# Altium PCB STM32.PcbDoc
Units mm, origin at the board's own origin, x right, y up, seen from the top; angles counter-clockwise.
Board outline 69.98 x 44.55 mm, 2 copper layers (Top Layer, Bottom Layer); 48 components, 65 nets, 240 pads, 53 vias.
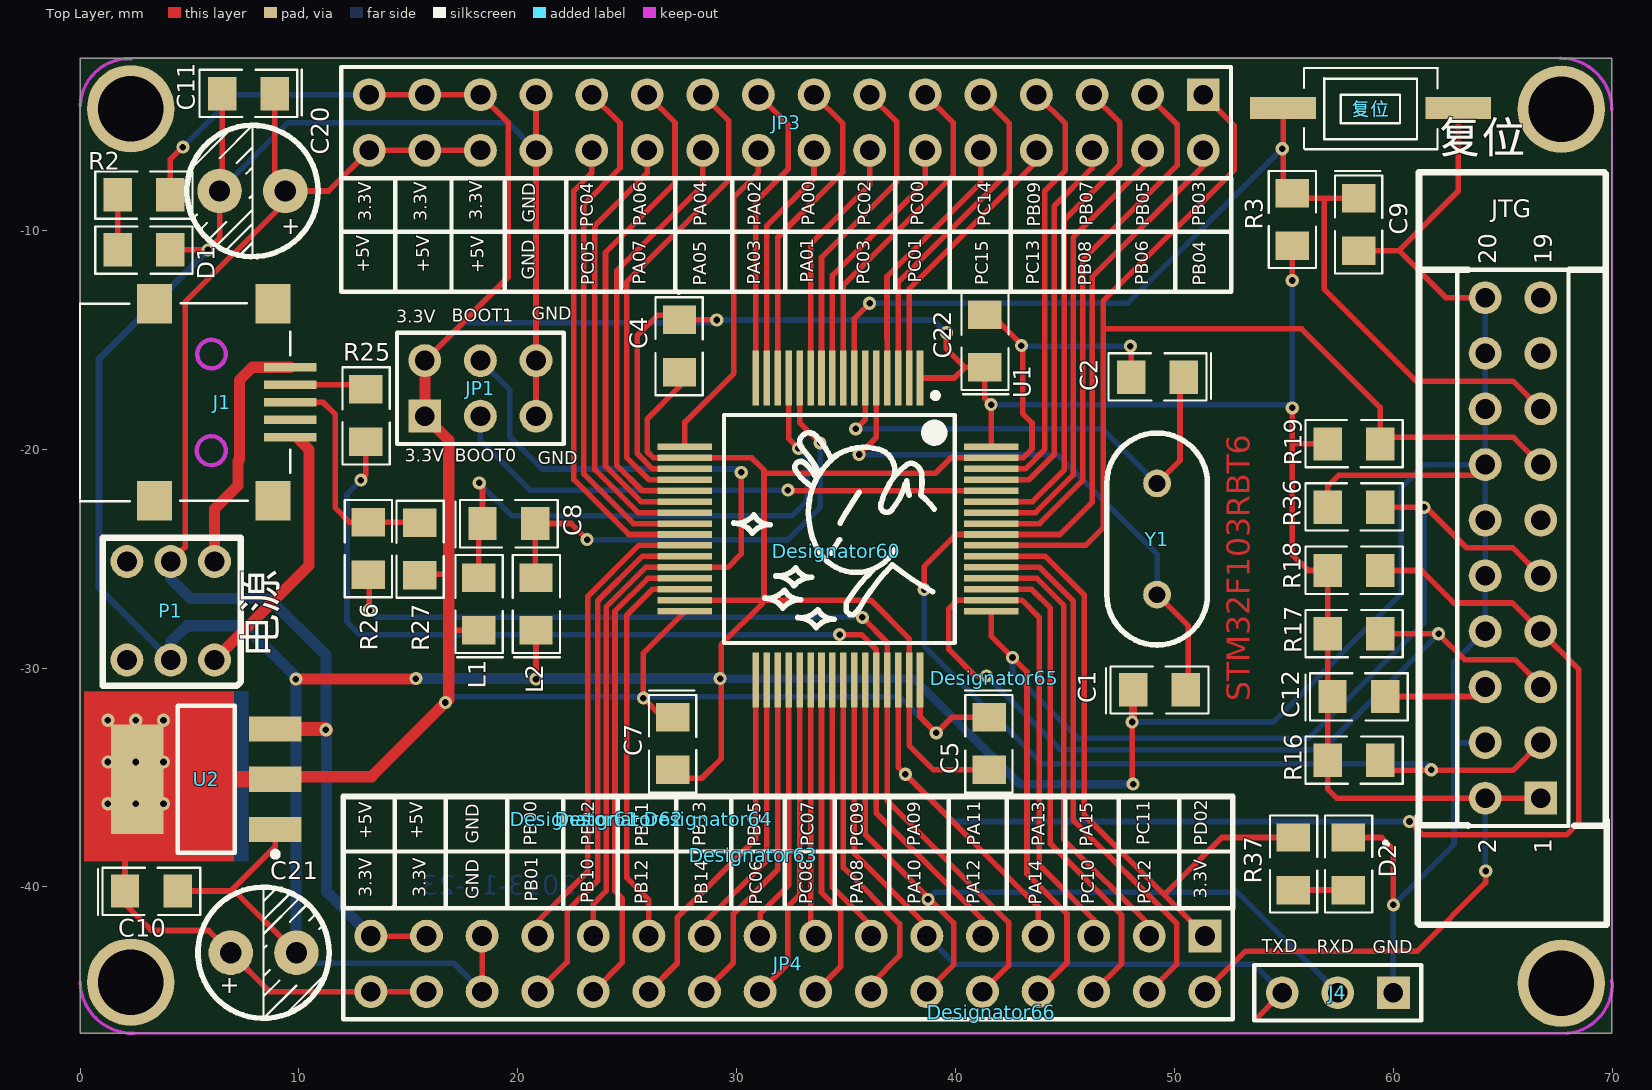
[diagram p0: Top Layer view]
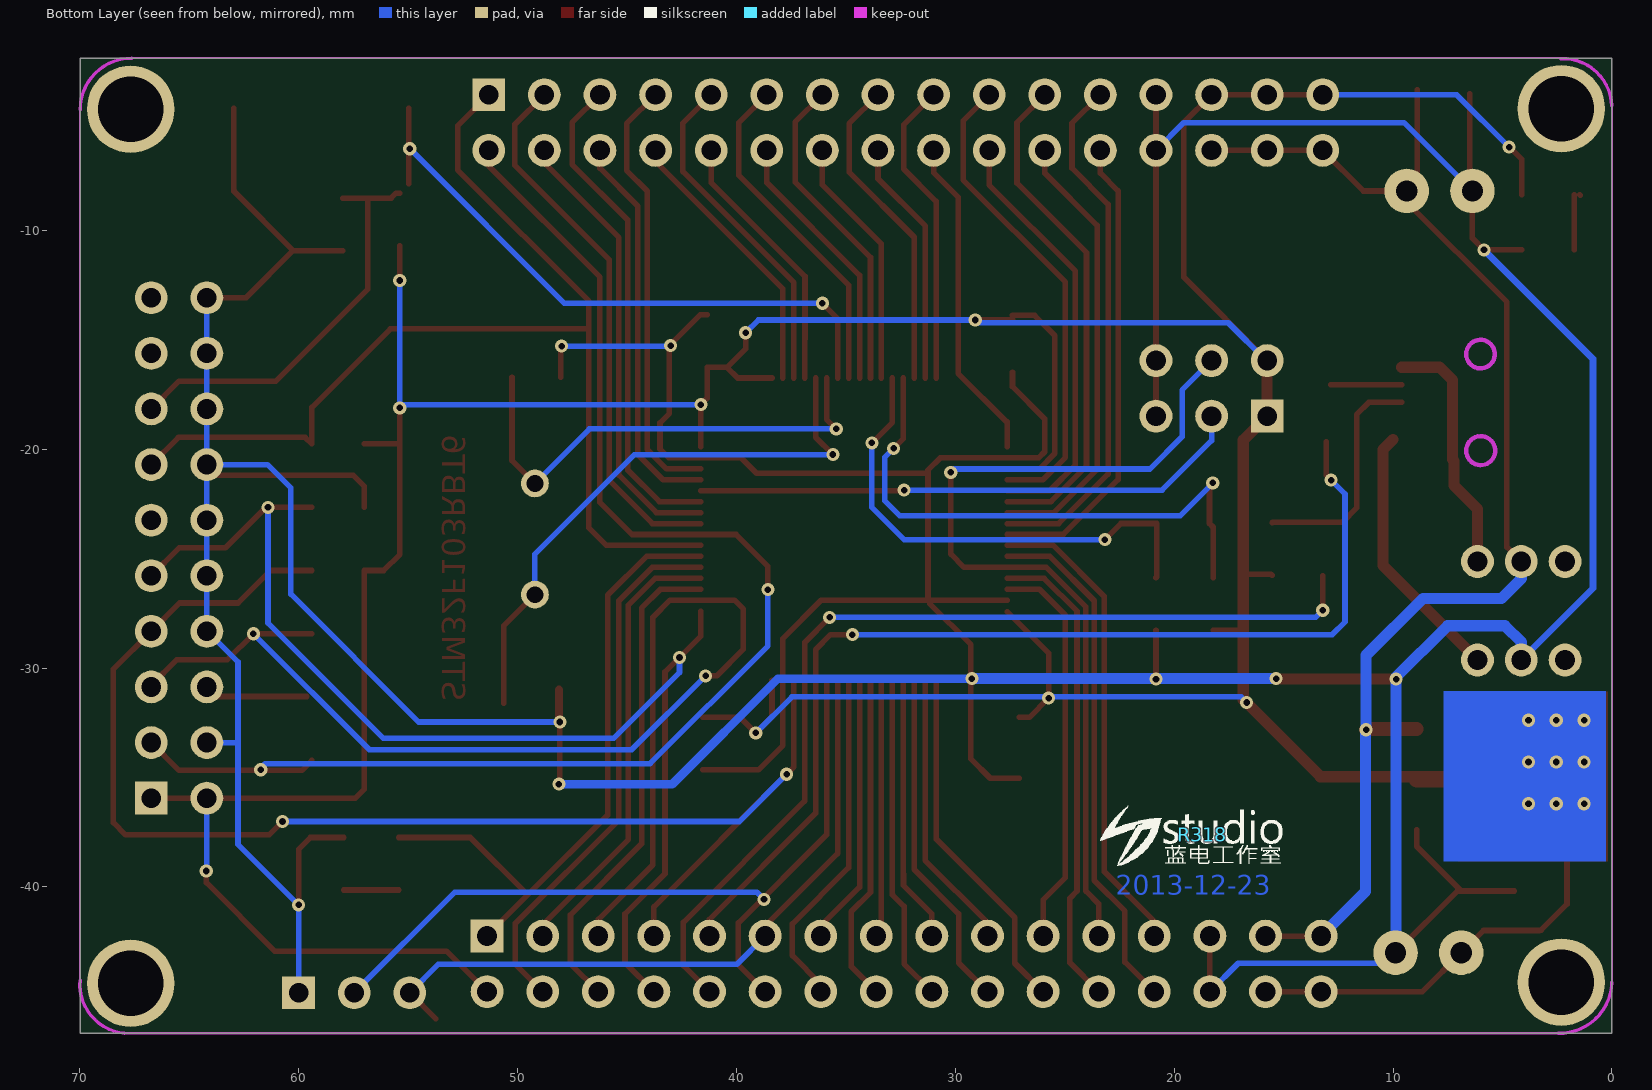
[diagram p1: Bottom Layer view, seen from below]

## Layer stack, top to bottom
Top Layer: signal copper 0.0356
Dielectric: dielectric 0.32, FR-4, Dk 4.8
Bottom Layer: signal copper 0.0356

## Board outline
0,-2.134 0,-46.685 69.977,-46.685 69.977,-2.134 0,-2.134

## Design rules (kind name [scope] priority, off if disabled: settings)
Clearance [All] p1: gap=0.254
FabricationTestpoint [(IsPad And (OnTopLayer Or OnBottomLayer))] p1: side=3 testpointundercomponent=TRUE minsize=1.016 maxsize=2.54 preferedsize=1.524 minholesize=0 maxholesize=1.016 preferedholesize=0.813 testpointgrid=0.025 allowsidetop=TRUE allowsidebottom=TRUE usegrid=TRUE gridtolerance=0
PolygonConnect [All] p1: connectstyle=Relief reliefconductorwidth=0.254 reliefentries=4 polygonreliefangle="90 Angle" airgapwidth=0.254
RoutingVias [All] p1: holewidth=0.3 width=0.6 viastyle="Through Hole" minholewidth=0.3 minwidth=0.6 maxholewidth=0.3 maxwidth=0.6
SilkToSolderMaskClearance SilkscreenOverComponentPads [IsPad] p1: minsilkscreentomaskgap=0.254 clearancetoexposedcopper=TRUE
SolderMaskExpansion [All] p1: expansion=0.102
Width [All] p1: maxlimit=0.762 minlimit=0.254 preferedwidth=0.254
26 further rules are at their usual default settings.

## Classes and differential pairs
component class STM32最小系统: C1 C2 C4 C5 C7 C8 C9 C10 C11 C12 C20 C21 C22 D1 D2 J1 J4 JP1 JP3 JP4 JTG L1 L2 P1 R2 R3 R16 R17 R18 R19 R25 R26 R27 R36 R37 U1 U2 Y1 Y2 复位

## Components (designator, comment, footprint, x,y, rotation, side; value= is the part's Value field where it differs from the comment)
C1 "Cap" C0805 49.301,-30.988 r0 top
C2 "Cap" C0805 49.225,-16.713 r180 top
C4 "Cap" C0805 27.381,-15.291 r270 top
C5 "Cap" C0805 41.529,-33.452 r270 top
C7 "Cap" C0805 27.076,-33.452 r270 top
C8 "Cap" C0805 19.583,-23.393 r0 top
C9 "Cap" C0805 58.42,-9.728 r270 top
C10 "Cap" C0805 3.251,-40.183 r0 top
C11 "Capacitor" C0805 7.696,-3.759 r180 top
C12 "Cap" C0805 58.413,-31.298 r0 top
C20 "Capacitor" 47uF_25V 7.874,-8.204 r180 top
C21 "Capacitor" 47uF_25V 8.382,-43.002 r0 top
C22 "Cap" C0805 41.326,-15.062 r90 top
D1 "LED" 0805D 2.921,-10.897 r0 top
D2 "LED" 0805D 57.937,-38.938 r90 top
Designator60 "Comment" 兔斯基-1 34.544,-24.663 r90 top
Designator61 "Comment" 蓝电studio 22.581,-36.906 r0 top
Designator62 "Comment" 蓝电studio 24.638,-36.906 r0 top
Designator63 "Comment" 蓝电studio 30.759,-38.557 r0 top
Designator64 "Comment" 蓝电studio 28.702,-36.906 r0 top
Designator65 "Comment" 蓝电studio 41.758,-30.455 r0 top
Designator66 "Comment" 蓝电studio 41.631,-45.72 r0 top
Designator67 "Comment" 蓝电studio 33.198,-51.232 r0 top
J1 "Mini_USB" Mini_USB 6.502,-17.856 r0 top
J4 "Header 3" HDR1X3 57.455,-44.831 r180 top
JP1 "Header 3X2" HDR2X3 18.288,-17.221 r0 top
JP3 "Header 16X2" HDR2X16 32.258,-5.08 r180 top locked
JP4 "TFT" HDR2X16 32.334,-43.51 r180 top
JTG "Header 10X2" HDR2X10 65.456,-24.511 r90 top
L1 "Inductor" C0805 18.212,-27.076 r90 top
L2 "Inductor" C0805 20.828,-27.076 r90 top
P1 "5.8*5.8MM 自锁开关 六脚" "5.8*5.8MM 自锁开关 六脚" 4.14,-27.381 r270 top
R2 "Resistor" R0805 2.921,-8.382 r0 top
R3 "Resistor" R0805 55.372,-9.5 r90 top
R16 "Resistor" R0805 58.191,-34.214 r180 top
R17 "Resistor" R0805 58.191,-28.433 r180 top
R18 "Resistor" R0805 58.191,-25.542 r180 top
R19 "Resistor" R0805 58.191,-19.761 r180 top
R25 "Resistor" R0805 13.056,-18.466 r90 top
R26 "Resistor" R0805 13.157,-24.536 r90 top
R27 "Resistor" R0805 15.519,-24.562 r90 top
R36 "Resistor" R0805 58.191,-22.652 r180 top
R37 "Resistor" R0805 55.423,-38.938 r90 top
R318 "Comment" LDLOGO 18.72,-37.617 r180 bottom
U1 "STM32F103RBT6" LQFP-64N 34.62,-23.647 r270 top locked
U2 "ASM1117" SOT-223 5.766,-35.077 r90 top
Y1 "Xtal" CRYSTAL 49.2,-24.105 r270 top
复位 "SW-PB" TD-19XA 58.953,-4.42 r180 top (schematic designator RST1)

## Footprints (in the part's own frame and the unit in brackets; to place one, negate y for a bottom-side part, rotate by r counter-clockwise, add the part's x,y. Pads: shape width x height; smd on the part's side, far side on the other; paste and mask are expansions set on the pad)
"5.8*5.8MM 自锁开关 六脚" [mm]
  round 1.5 hole 0.9: 1(-2.25,2) 2(2.25,2) 3(-2.25,0) 4(2.25,0) 5(-2.25,-2) 6(2.25,-2)
  silkscreen extent -3.33,-3.11 3.43,3.2
47uF_25V [mil]
  round 80 hole 38: 1(-59.06,0) 2(59.06,0)
  silkscreen extent -118,-118 118,118, body extent -118,-119 120,119, height 433
0805D [mm]
  rect 1.3x1.524 smd: 1(-1.2,0) 2(1.2,0)
  silkscreen extent -2.23,-1.09 2.21,1.07, body extent -1.6,-0.8 1.6,0.8, height 1.07
C0805 [mm]
  rect 1.3x1.524 smd: 1(-1.2,0) 2(1.2,0)
  silkscreen extent -2.43,-1.09 2.24,1.07, body extent -0.87,-0.64 1.13,0.62, height 0.77
CRYSTAL [mil]
  round 50 hole 30: 1(-100,0) 2(100,0)
  silkscreen extent -191,-91 191,91, body extent -224,-90 222,93, height 138
HDR1X3 [mm] "Connector; Header; 3 Position"
  rect 1.5x1.5 hole 0.9: 1(-2.54,0)
  round 1.5 hole 0.9: 2(0,0) 3(2.54,0)
  silkscreen extent -3.81,-1.27 3.81,1.27, body extent -3.81,-1.27 3.81,1.27, height 7.58
HDR2X3 [mm] "Connector; Header; 3x2 Position"
  rect 1.5x1.5 hole 0.9: 1(-2.54,-1.27)
  round 1.5 hole 0.9: 2(-2.54,1.27) 3(0,-1.27) 4(0,1.27) 5(2.54,-1.27) 6(2.54,1.27)
  silkscreen extent -3.81,-2.54 3.81,2.54, body extent -3.81,-2.54 3.81,2.54, height 7.58
HDR2X10 [mm] "Connector; Header; 10x2 Position"
  rect 1.5x1.5 hole 0.9: 1(-11.43,-1.27)
  round 1.5 hole 0.9: 2(-11.43,1.27) 3(-8.89,-1.27) 4(-8.89,1.27) 5(-6.35,-1.27) 6(-6.35,1.27) 7(-3.81,-1.27) 8(-3.81,1.27) 9(-1.27,-1.27) 10(-1.27,1.27) 11(1.27,-1.27) 12(1.27,1.27) 13(3.81,-1.27) 14(3.81,1.27) 15(6.35,-1.27) 16(6.35,1.27) 17(8.89,-1.27) 18(8.89,1.27) 19(11.43,-1.27) 20(11.43,1.27)
  silkscreen extent -12.7,-2.54 12.7,2.54, body extent -12.7,-2.54 12.7,2.54, height 7.58
HDR2X16 [mm] "Connector; Header; 16x2 Position"
  rect 1.5x1.5 hole 0.9: 1(-19.05,-1.27)
  round 1.5 hole 0.9: 2(-19.05,1.27) 3(-16.51,-1.27) 4(-16.51,1.27) 5(-13.97,-1.27) 6(-13.97,1.27) 7(-11.43,-1.27) 8(-11.43,1.27) 9(-8.89,-1.27) 10(-8.89,1.27) 11(-6.35,-1.27) 12(-6.35,1.27) 13(-3.81,-1.27) 14(-3.81,1.27) 15(-1.27,-1.27) 16(-1.27,1.27) 17(1.27,-1.27) 18(1.27,1.27) 19(3.81,-1.27) 20(3.81,1.27) 21(6.35,-1.27) 22(6.35,1.27) 23(8.89,-1.27) 24(8.89,1.27) 25(11.43,-1.27) 26(11.43,1.27) 27(13.97,-1.27) 28(13.97,1.27) 29(16.51,-1.27) 30(16.51,1.27) 31(19.05,-1.27) 32(19.05,1.27)
  silkscreen extent -20.32,-2.54 20.32,2.54, body extent -20.32,-2.54 20.32,2.54, height 7.58
LDLOGO [mm]
  silkscreen extent -4.65,-1.42 3.66,1.3
LQFP-64N [mm] "TSQFP, 64-Leads, Body 12.0x12.0mm (max), Pitch 0.50mm, IPC Medium Density"
  rect 2.5x0.3 smd: 1(-6.9,3.75) 2(-6.9,3.25) 3(-6.9,2.75) 4(-6.9,2.25) 5(-6.9,1.75) 6(-6.9,1.25) 7(-6.9,0.75) 8(-6.9,0.25) 9(-6.9,-0.25) 10(-6.9,-0.75) 11(-6.9,-1.25) 12(-6.9,-1.75) 13(-6.9,-2.25) 14(-6.9,-2.75) 15(-6.9,-3.25) 16(-6.9,-3.75) 33(6.9,-3.75) 34(6.9,-3.25) 35(6.9,-2.75) 36(6.9,-2.25) 37(6.9,-1.75) 38(6.9,-1.25) 39(6.9,-0.75) 40(6.9,-0.25) 41(6.9,0.25) 42(6.9,0.75) 43(6.9,1.25) 44(6.9,1.75) 45(6.9,2.25) 46(6.9,2.75) 47(6.9,3.25) 48(6.9,3.75)
  rect 0.3x2.5 smd: 17(-3.75,-7) 18(-3.25,-7) 19(-2.75,-7) 20(-2.25,-7) 21(-1.75,-7) 22(-1.25,-7) 23(-0.75,-7) 24(-0.25,-7) 25(0.25,-7) 26(0.75,-7) 27(1.25,-7) 28(1.75,-7) 29(2.25,-7) 30(2.75,-7) 31(3.25,-7) 32(3.75,-7) 49(3.75,7) 50(3.25,7) 51(2.75,7) 52(2.25,7) 53(1.75,7) 54(1.25,7) 55(0.75,7) 56(0.25,7) 57(-0.25,7) 58(-0.75,7) 59(-1.25,7) 60(-1.75,7) 61(-2.25,7) 62(-2.75,7) 63(-3.25,7) 64(-3.75,7)
  silkscreen extent -6.22,-5.21 5.21,5.33, body extent -6.1,-6.1 6.1,6.1, height 1.6
Mini_USB [mm]
  rect 2.4x0.4 smd: 1(3.1,1.6) 2(3.1,0.8) 3(3.1,0) 4(3.1,-0.8) 5(3.1,-1.6)
  rect 1.6x1.8 smd: 6(2.3,-4.5) 7(2.3,4.5) 8(-3.1,4.5) 9(-3.1,-4.5)
  silkscreen extent -6.51,-4.52 3.1,4.52, body extent -5.92,-5.32 3.28,5.38, height 3.95
R0805 [mm]
  rect 1.3x1.524 smd: 1(-1.2,0) 2(1.2,0)
  silkscreen extent -2.23,-1.09 2.21,1.07, body extent -0.93,-0.63 1.07,0.63, height 0.77
SOT-223 [mm]
  rect 1.15x2.4 smd: 1(-2.3,-3.15) 2(0,-3.15) 3(2.3,-3.15)
  rect 5x2.4 smd: 2(0,3.15)
  silkscreen extent -3.55,-3.27 3.35,1.3, body extent -3.25,-3.45 3.25,3.51, height 1.65
TD-19XA [mm]
  rect 3x1 smd: 1(-4,0) 2(4,0)
  silkscreen extent -3.06,-1.83 3.04,1.88, body extent -3.92,-1.85 3.97,2, height 2.5
兔斯基-1 [mm]
  silkscreen extent -3.48,-4.47 5.41,4.67
蓝电studio [mm]

## Part data
C1 C2 C4 C5 C7 C8 C9 C10 C12 C22: "Capacitor"
J4: "Header, 3-Pin"
JP1: "Header, 3-Pin, Dual row"
JP3: "Header, 16-Pin, Dual row"
JP4: library part "Header 16X2", "Header, 16-Pin, Dual row"
JTG: "Header, 10-Pin, Dual row"
复位: library part Switch

## Free pads (board coordinates)
  round 4 hole 3: 0(67.666,-4.47) 1(67.666,-44.399) 2(2.311,-44.348) 3(2.311,-4.445)

## Via types
v1: diameter 0.6, hole 0.3, Top Layer to Bottom Layer, 53 vias

## Nets (pads, with @x,y where several pads share a name; then routed paths per layer and width w, separated by ;. In a path a pad name is that pad's centre, name@x,y a point inside that pad or via, vN(x,y) a via of type N, cw(c..) or ccw(c..) an arc to the next point about the centre after c; other vN are vias at no path point)
3.3V: C4.1 C5.1 C7.1 C10.1 C12.1 C21.1 C22.1 JP1.1 JP1.2 JP3.27 JP3.29 JP3.31 JP4.2 JP4.30 JP4.32 JTG.1 JTG.2 L1.1 R2.2 R3.1 R16.2 R17.2 R18.2 R19.2 R27.1 U1.1 U1.19 U1.32 U1.48 U1.64 U2.2 | length 237.7
  Top Layer w0.254: U2.2@2.616,-35.077 2.051,-35.642 C10.1 2.051,-40.786 3.232,-41.967 3.298,-41.967 3.316,-41.986 5.866,-41.986 C21.1 8.66,-44.78 JP4.32 JP4.30 ; R2.2 4.121,-6.75 v1@4.674,-6.198 ; JP3.31 JP3.29 JP3.27 19.558,-5.08 19.558,-12.141 JP1.2 ; R27.1 15.576,-25.705 16.84,-25.705 ; 16.84,-28.276 L1.1 ; C7.1 26.613,-32.252 v1(25.73,-31.369) 25.73,-29.318 U1.32@27.62,-27.428 ; C4.1 v1@29.077,-14.091 ; C4.1@27.381,-13.888 26.371,-13.888 25.451,-14.808 25.451,-20.193 26.155,-20.897 U1.19 ; U1.48 38.37,-32.223 v1(39.11,-32.963) 39.821,-32.252 C5.1 ; U1.1 39.932,-16.747 40.418,-16.262 ; v1(39.573,-14.681) 39.573,-15.418 40.418,-16.262 ; U1.64 v1(41.62,-17.965) 41.326,-17.671 C22.1 40.418,-16.262 ; JP4.2 53.238,-42.926 61.087,-42.926 64.211,-39.802 v1(64.211,-39.268) ; v1(55.372,-18.11) 55.372,-24.806 56.109,-25.542 R18.2 R17.2 R16.2 56.991,-35.528 57.404,-35.941 JTG.2 JTG.1 ; v1(55.372,-12.294) R3.1 ; 55.397,-19.761 R19.2
  Top Layer w0.508: U2.2@8.916,-35.077 9.03,-34.963 13.322,-34.963 16.84,-31.445 16.84,-28.276 16.84,-25.705 16.84,-19.583 JP1.1 JP1.2
  Top Layer w0.762: U2.2@2.616,-35.077 U2.2@8.916,-35.077
  Bottom Layer w0.254: v1(4.699,-6.198) 7.087,-3.81 JP3.31 ; JP1.2 15.799,-15.951 17.526,-14.224 28.956,-14.224 v1(29.083,-14.097) 38.989,-14.097 v1(39.573,-14.681) ; v1(16.688,-31.572) 16.942,-31.318 37.465,-31.318 v1(39.11,-32.963) ; v1(41.62,-17.965) 55.227,-17.965 v1(55.372,-18.11) v1(55.372,-12.294) ; JTG.2 64.186,-39.243 v1(64.211,-39.268)
  other v1: 1.27,-36.195 2.54,-36.195 3.81,-36.195 1.27,-34.29 2.54,-34.29 3.81,-34.29 1.27,-32.385 2.54,-32.385 3.81,-32.385
5V: C11.1 C20.1 JP3.28 JP3.30 JP3.32 JP4.29 JP4.31 P1.3 U2.3 | length 61.5
  Top Layer w0.254: P1.3 4.801,-24.471 4.801,-13.284 9.374,-8.711 C20.1 ; C11.1@8.896,-3.581 8.896,-7.726 C20.1 ; JP4.31 JP4.29 ; JP3.28 JP3.30 JP3.32 11.354,-8.204 C20.1
  Top Layer w0.635: U2.3 11.187,-32.777 v1(11.227,-32.817)
  Bottom Layer w0.508: P1.3 4.14,-25.908 5.055,-26.822 8.636,-26.822 11.227,-29.413 v1(11.227,-32.817) 11.252,-32.842 11.252,-40.208 JP4.31
BOOT0: JP1.3 U1.60 | length 25.4
  Top Layer w0.254: v1(32.334,-21.869) 32.362,-21.897 U1.60
  Bottom Layer w0.254: JP1.3 18.288,-19.609 20.549,-21.869 v1(32.334,-21.869)
BOOT1: JP1.4 JP4.23 U1.28 | length 40.7
  Top Layer w0.254: 23.444,-41.453 23.444,-40.767 24.028,-40.183 24.028,-27.203 25.834,-25.397 U1.28 29.591,-25.397 30.201,-24.788 v1(30.201,-21.057)
  Bottom Layer w0.254: JP1.4 19.634,-17.297 19.634,-19.431 21.107,-20.904 30.048,-20.904 v1(30.201,-21.057)
GND: C1.1 C2.2 C4.2 C5.2 C7.2 C9.2 C10.2 C11.2 C20.2 C21.2 C22.2 D1.2 D2.2 J4.1 JP1.5 JP1.6 JP3.25 JP3.26 JP4.27 JP4.28 JTG.4 JTG.8 JTG.10 JTG.12 JTG.14 JTG.16 JTG.18 JTG.20 L2.1 P1.4 R36.2 U1.18 U1.31 U1.47 U1.63 U2.1 复位.1 | length 311.1
  Top Layer w0.254: D1.2 v1(5.842,-10.897) 6.374,-10.365 C20.2 6.496,-8.082 C11.2 ; C10.2 6.883,-40.183 ; U2.1 8.916,-38.15 6.883,-40.183 ; C21.2 7.063,-40.183 6.883,-40.183 ; JP4.28 JP4.27 ; v1(20.828,-30.505) L2.1 ; JP1.5 JP1.6 JP3.26 JP3.25 ; C7.2@27.076,-35.033 28.397,-35.033 29.286,-34.144 29.286,-28.931 31.166,-27.051 31.166,-26.897 31.242,-26.821 31.242,-21.083 ; C4.2 27.381,-17.145 25.908,-18.618 25.908,-20.117 26.189,-20.397 U1.18 30.683,-20.397 31.242,-20.956 31.242,-21.083 ; U1.31 36.118,-26.897 37.87,-28.65 U1.47 37.87,-33.527 38.995,-34.652 C5.2 ; C22.2 41.65,-13.862 43.053,-15.265 43.053,-18.364 43.485,-18.796 43.485,-19.99 43.077,-20.397 U1.63 39.775,-20.397 39.065,-21.107 31.266,-21.107 31.242,-21.083 ; v1(47.981,-15.291) 48.025,-15.335 C2.2 ; v1(48.057,-32.461) 48.057,-35.255 v1(48.101,-35.3) ; R36.2 56.991,-21.698 57.506,-21.184 63.703,-21.184 JTG.14 ; D2.2 59.455,-37.738 59.995,-38.278 v1(59.995,-40.818) ; C9.2@57.988,-10.928 C9.2 60.243,-10.928 ; 62.928,-8.192 62.953,-8.167 复位.1 ; 62.953,-8.217 60.243,-10.928 ; JTG.20 62.395,-13.081 60.243,-10.928
  Top Layer w0.381: v1@48.101,-32.461 C1.1
  Top Layer w0.508: v1(9.855,-30.505) 15.291,-30.505 v1@15.342,-30.455
  Bottom Layer w0.254: C20.2 9.498,-5.08 19.558,-5.08 JP3.26 ; C21.2 10.365,-43.485 17.069,-43.485 JP4.28 ; v1(43.002,-15.265) 43.028,-15.291 v1(47.981,-15.291) ; v1(48.057,-32.461) 54.508,-32.461 60.35,-26.619 60.35,-21.768 61.417,-20.701 JTG.14 ; J4.1 v1(59.995,-40.818) 62.763,-38.049 62.763,-33.452 62.814,-33.401 ; JTG.4 62.814,-33.401 ; JTG.20 JTG.18 JTG.16 JTG.14 ; 62.814,-33.401 62.763,-33.35 62.763,-29.718 64.16,-28.321 JTG.8 JTG.10 JTG.12 JTG.14
  Bottom Layer w0.305: P1.4 0.864,-26.355 0.864,-15.875 v1(5.842,-10.897)
  Bottom Layer w0.381: v1(29.235,-30.48) 38.1,-30.48 42.926,-35.306 48.095,-35.306 v1(48.101,-35.3)
  Bottom Layer w0.508: P1.4 4.14,-28.804 4.877,-28.067 7.518,-28.067 9.882,-30.431 v1@9.882,-30.505 ; v1(9.855,-30.505) 9.855,-42.975 C21.2 ; v1(15.342,-30.48) v1@29.185,-30.48
NetC1_2: C1.2 U1.5 Y1.2 | length 26.7
  Top Layer w0.254: v1(35.585,-20.244) 36.37,-19.459 ; U1.5 36.37,-19.459 ; 36.378,-19.431 36.378,-19.451 36.37,-19.459 ; Y1.2 50.628,-28.073 C1.2@50.628,-31.598
  Bottom Layer w0.254: v1(35.585,-20.244) 44.653,-20.244 49.2,-24.79 Y1.2
NetC2_1: C2.1 U1.6 Y1.1 | length 22.6
  Top Layer w0.254: v1(35.433,-19.075) 35.87,-18.638 U1.6 ; Y1.1 50.247,-20.517 C2.1@50.247,-16.713
  Bottom Layer w0.254: v1(35.433,-19.075) 46.711,-19.075 Y1.1
NetC12_2: C12.2 JTG.6 | length 4.1
  Top Layer w0.254: C12.2 JTG.6@63.749,-31.298
NetD1_1: D1.1 R2.1 | length 2.6
  Top Layer w0.254: R2.1@1.442,-8.407 R2.1@1.467,-8.382 ; D1.1 R2.1
NetD2_1: D2.1 R37.1 | length 2.5
  Top Layer w0.254: R37.1 D2.1
NetJ1_2: J1.2 R25.2 | length 3.2
  Top Layer w0.254: J1.2 R25.2@12.846,-17.056
NetJ1_3: J1.3 R26.2 R27.2 | length 10.7
  Top Layer w0.254: J1.3 11.1,-17.856 11.659,-18.415 11.659,-22.682 12.313,-23.336 R26.2 15.494,-23.336 R27.2
PA00: JP3.15 U1.14 | length 14.7
  Top Layer w0.254: U1.14 31.87,-10.319 34.849,-7.341 34.849,-5.131 JP3.15
PA01: JP3.16 U1.15 | length 11.3
  Top Layer w0.254: U1.15 31.37,-14.054 31.362,-14.046 31.362,-9.811 33.528,-7.645 JP3.16
PA02: JP3.17 U1.16 | length 14.1
  Top Layer w0.254: U1.16 30.87,-8.678 32.36,-7.188 32.36,-5.182 JP3.17
PA03: JP3.18 U1.17 | length 15
  Top Layer w0.254: U1.17 27.62,-18.745 27.661,-18.745 29.87,-16.535 29.87,-8.484 30.988,-7.366 JP3.18
PA04: JP3.19 U1.20 | length 22.1
  Top Layer w0.254: U1.20 25.995,-21.397 24.968,-20.371 24.968,-12.37 29.642,-7.696 29.642,-5.004 JP3.19
PA05: JP3.20 U1.21 | length 19.6
  Top Layer w0.254: U1.21 25.682,-21.897 24.511,-20.726 24.511,-11.862 28.448,-7.925 JP3.20
PA06: JP3.21 U1.22 | length 23.1
  Top Layer w0.254: JP3.21 27.178,-5.08 27.178,-7.849 24.003,-11.024 24.003,-20.777 25.623,-22.397 U1.22
PA07: JP3.22 U1.23 | length 20.5
  Top Layer w0.254: JP3.22 25.908,-7.391 23.52,-9.779 23.52,-20.93 25.488,-22.897 U1.23
PA08: JP4.14 U1.41 | length 15.8
  Top Layer w0.254: U1.41 34.87,-39.112 37.44,-41.681 37.44,-43.129 36.144,-44.425 JP4.14
PA09: J4.3 JP4.11 U1.42 | length 32.6
  Top Layer w0.254: U1.42 35.37,-38.469 38.684,-41.783 JP4.11 JP4.11@38.684,-42.824 ; 53.721,-46.025 J4.3
  Bottom Layer w0.254: JP4.11 39.98,-43.536 53.619,-43.536 J4.3
PA10: J4.2 JP4.12 U1.43 | length 37.2
  Top Layer w0.254: 35.87,-37.613 U1.43 ; 35.878,-37.613 39.903,-41.638 39.903,-43.561 JP4.12
  Bottom Layer w0.254: v1(38.735,-40.564) 39.065,-40.234 52.857,-40.234 J4.2
PA11: JP4.9 R25.1 U1.44 | length 48.4
  Top Layer w0.254: v1(12.827,-21.412) 13.056,-21.184 R25.1 ; v1(34.696,-28.473) 35.687,-28.473 36.37,-29.157 U1.44 36.37,-31.986 36.37,-36.299 ; 36.378,-36.299 36.378,-36.632 41.224,-41.478 JP4.9
  Bottom Layer w0.254: v1(12.827,-21.412) 12.192,-22.047 12.192,-27.889 12.776,-28.473 v1(34.696,-28.473)
PA12: JP4.10 R26.1 U1.45 | length 44.6
  Top Layer w0.254: v1(13.208,-27.356) R26.1@13.208,-25.787 ; v1(35.738,-27.686) 36.87,-28.818 U1.45 36.87,-36.073 ; 36.878,-36.073 42.418,-41.612 42.418,-43.586 JP4.10
  Bottom Layer w0.254: v1(13.208,-27.356) 13.538,-27.686 v1(35.738,-27.686)
PA13: JP4.7 JTG.7 R18.1 U1.46 | length 64.4
  Top Layer w0.254: U1.46 37.37,-34.519 v1(37.7,-34.849) 43.764,-40.913 JP4.7 ; R18.1 61.28,-25.542 62.763,-27.026 65.43,-27.026 JTG.7 68.453,-30.048 68.453,-37.059 67.894,-37.617 61.341,-37.617 v1(60.731,-37.008)
  Bottom Layer w0.254: v1(37.7,-34.849) 39.859,-37.008 v1(60.731,-37.008)
PA14: JP4.8 JTG.9 R36.1 U1.49 | length 56.2
  Top Layer w0.254: U1.49 41.62,-28.539 v1(42.596,-29.515) 43.256,-30.175 43.256,-39.395 45.085,-41.224 45.085,-43.459 JP4.8 ; R36.1 61.488,-22.652 63.348,-24.511 65.456,-24.511 JTG.9
  Bottom Layer w0.254: v1(42.596,-29.515) 42.596,-30.201 45.593,-33.198 56.134,-33.198 61.392,-27.94 v1(61.392,-22.657)
PA15: JP4.5 JTG.5 R17.1 U1.50 | length 56.2
  Top Layer w0.254: v1(41.402,-30.353) 40.894,-30.353 39.675,-29.134 39.675,-27.305 40.082,-26.897 U1.50 43.026,-26.897 43.815,-27.686 43.815,-38.989 46.304,-41.478 ; R17.1 v1(62.062,-28.433) 63.246,-29.616 65.557,-29.616 66.726,-30.785 JTG.5
  Bottom Layer w0.254: v1(41.402,-30.353) 44.78,-33.731 56.764,-33.731 v1(62.062,-28.433)
PB00: JP4.25 U1.26 | length 21.9
  Top Layer w0.254: JP4.25 20.904,-41.58 23.19,-39.294 23.19,-26.721 25.514,-24.397 U1.26
PB01: JP4.26 U1.27 | length 23.8
  Top Layer w0.254: JP4.26 22.25,-43.434 22.25,-41.097 23.647,-39.7 23.647,-26.924 25.674,-24.897 U1.27
PB03: JP3.1 JTG.13 R19.1 U1.55 | length 52.1
  Top Layer w0.254: U1.55 45.935,-24.397 46.736,-23.597 46.736,-14.503 ; JP3.1 52.73,-5.232 52.73,-7.239 46.736,-13.233 46.736,-14.503 ; JTG.13 65.481,-19.456 59.696,-19.456 R19.1 59.391,-18.091 55.804,-14.503 46.736,-14.503
PB04: JP3.2 JTG.3 R16.1 U1.56 | length 64.3
  Top Layer w0.254: v1(38.557,-26.416) 38.557,-25.349 40.009,-23.897 U1.56 44.759,-23.897 46.228,-22.428 46.228,-12.141 51.308,-7.061 JP3.2 ; R16.1 59.849,-34.671 65.456,-34.671 JTG.3
  Bottom Layer w0.254: v1(38.557,-26.416) 38.557,-28.981 43.942,-34.366 61.519,-34.366 v1@61.747,-34.595
  other v1: 61.722,-34.646
PB05: JP3.3 U1.57 | length 25
  Top Layer w0.254: U1.57 43.836,-23.397 45.796,-21.438 45.796,-11.354 50.114,-7.036 50.114,-5.156 JP3.3
PB06: JP3.4 U1.58 | length 20.7
  Top Layer w0.254: U1.58 43.651,-22.897 45.364,-21.184 45.364,-10.338 48.768,-6.934 JP3.4
PB07: JP3.5 U1.59 | length 22.7
  Top Layer w0.254: U1.59 43.516,-22.397 44.958,-20.955 44.958,-9.525 47.498,-6.985 47.498,-5.08 JP3.5
PB08: JP3.6 U1.61 | length 18
  Top Layer w0.254: U1.61 43.347,-21.397 44.501,-20.244 44.501,-8.89 46.228,-7.163 JP3.6
PB09: JP3.7 U1.62 | length 20
  Top Layer w0.254: U1.62 43.187,-20.897 44.069,-20.015 44.069,-8.204 45.009,-7.264 45.009,-5.131 JP3.7
PB10: JP4.24 U1.29 | length 21.9
  Top Layer w0.254: JP4.24 24.765,-43.459 24.765,-40.513 24.435,-40.183 24.435,-27.399 25.937,-25.897 U1.29
PB11: JP4.21 U1.30 | length 18.2
  Top Layer w0.254: JP4.21 25.984,-40.589 24.968,-39.573 24.968,-27.584 26.155,-26.397 U1.30
PB12: JP4.22 U1.33 | length 16.3
  Top Layer w0.254: JP4.22 27.28,-43.485 27.28,-41.402 30.862,-37.819 30.862,-37.567 ; 30.87,-37.567 U1.33
PB13: JP4.19 U1.34 | length 12.9
  Top Layer w0.254: JP4.19 28.524,-41.631 31.37,-38.785 U1.34
PB14: JP4.20 U1.35 | length 15.6
  Top Layer w0.254: JP4.20 29.845,-43.459 29.845,-41.224 31.87,-39.199 U1.35
PB15: JP4.17 U1.36 | length 12.2
  Top Layer w0.254: JP4.17 31.064,-41.224 32.362,-39.926 32.362,-39.425 ; 32.37,-39.425 U1.36
PC00: JP3.11 U1.8 | length 15.5
  Top Layer w0.254: U1.8 34.87,-12.501 39.878,-7.493 39.878,-5.08 JP3.11
PC01: JP3.12 U1.9 | length 12.2
  Top Layer w0.254: U1.9 34.37,-12.061 38.608,-7.823 JP3.12
PC02: JP3.13 U1.10 | length 14.9
  Top Layer w0.254: U1.10 33.87,-11.24 37.313,-7.798 37.313,-5.055 JP3.13
PC03: JP3.14 U1.11 | length 11.5
  Top Layer w0.254: U1.11 33.37,-10.623 36.068,-7.925 JP3.14
PC04: JP3.23 U1.24 | length 24.1
  Top Layer w0.254: JP3.23 24.663,-5.105 24.663,-7.163 23.012,-8.814 23.012,-21.133 25.277,-23.397 U1.24
PC05: JP3.24 U1.25 | length 21.5
  Top Layer w0.254: JP3.24 23.368,-7.391 22.555,-8.204 22.555,-21.394 25.067,-23.905 25.075,-23.897 U1.25
PC06: JP4.18 U1.37 | length 15
  Top Layer w0.254: JP4.18 32.334,-43.51 32.334,-40.889 32.862,-40.361 ; 32.87,-40.361 U1.37
PC07: JP4.15 U1.38 | length 11.8
  Top Layer w0.254: U1.38 33.37,-42.006 JP4.15
PC08: JP4.16 U1.39 | length 15.1
  Top Layer w0.254: JP4.16 34.747,-43.637 34.747,-41.123 33.87,-40.246 U1.39
PC09: JP4.13 U1.40 | length 12.4
  Top Layer w0.254: U1.40 34.37,-40.009 36.144,-41.783 JP4.13
PC10: JP4.6 U1.51 | length 22.5
  Top Layer w0.254: U1.51 43.466,-26.397 44.323,-27.254 44.323,-38.024 47.574,-41.275 47.574,-43.51 JP4.6
PC11: JP4.3 U1.52 | length 20.6
  Top Layer w0.254: U1.52 43.474,-25.897 ; 43.474,-25.889 43.695,-25.889 44.933,-27.127 44.933,-37.821 48.844,-41.732 JP4.3
PC12: JP4.4 U1.53 | length 24.7
  Top Layer w0.254: U1.53 43.838,-25.397 45.364,-26.924 45.364,-36.932 50.089,-41.656 50.089,-43.536 JP4.4
PC13: JP3.8 U1.2 | length 12.8
  Top Layer w0.254: U1.2 37.87,-12.676 43.688,-6.858 JP3.8
PC14: JP3.9 U1.3 | length 15.6
  Top Layer w0.254: U1.3 37.37,-12.388 42.443,-7.315 42.443,-5.105 JP3.9
PC15: JP3.10 U1.4 | length 12.2
  Top Layer w0.254: U1.4 36.87,-14.969 36.862,-14.961 36.862,-12.109 41.148,-7.823 JP3.10
PD02: JP4.1 R37.2 U1.54 | length 29.8
  Top Layer w0.254: U1.54 44.1,-24.897 45.872,-26.67 45.872,-36.721 45.891,-36.721 49.517,-40.348 ; JP4.1 51.384,-42.215 49.517,-40.348 ; R37.2 52.152,-37.738 49.543,-40.348 49.517,-40.348
RST#: C9.1 JTG.15 R3.2 U1.7 复位.2 | length 48
  Top Layer w0.254: U1.7 35.37,-14.033 v1(36.068,-13.335) ; R3.2@54.953,-7.881 复位.2 ; R3.2 55.544,-8.3 55.772,-8.528 56.845,-8.528 ; C9.1@57.988,-8.528 56.845,-8.528 ; JTG.15 65.456,-16.891 61.036,-16.891 56.845,-12.7 56.845,-8.528
  Bottom Layer w0.254: v1(36.068,-13.335) 47.854,-13.335 v1(54.915,-6.274)
USB_GND: J1.5 P1.2 | length 12.1
  Top Layer w0.508: P1.2 10.465,-25.307 10.465,-20.015 J1.5@10.008,-19.558
VCC5: J1.1 P1.1 | length 11.3
  Top Layer w0.508: P1.1 6.14,-22.74 7.214,-21.666 7.214,-20.539 7.289,-20.464 7.289,-16.841 7.874,-16.256 J1.1
VDDA: C8.1 L1.2 U1.13 | length 26.3
  Top Layer w0.254: L1.2 18.212,-23.565 C8.1 18.383,-21.685 v1(18.237,-21.539) ; U1.13 32.37,-19.518 v1(32.817,-19.964)
  Bottom Layer w0.254: v1@18.237,-21.565 19.71,-23.038 32.537,-23.038 33.223,-22.352 33.223,-20.371 v1(32.817,-19.964)
VSSA: C8.2 L2.2 U1.12 | length 22.7
  Top Layer w0.254: L2.2 20.783,-25.832 C8.2 22.428,-23.393 v1(23.165,-24.13) ; U1.12 32.87,-18.773 v1(33.807,-19.71)
  Bottom Layer w0.254: v1(23.165,-24.13) 32.334,-24.13 33.807,-22.657 v1(33.807,-19.71)
pads on no net: J1.4 J1.6 J1.7 J1.8 J1.9 JTG.11 JTG.17 JTG.19 P1.5 P1.6

## Keep-outs
Keep-Out Layer:
  circle w0.203: c6.002,-15.656 r0.653
  circle w0.203: c5.992,-20.066 r0.662
  lines w0.102: 0,-44.323 0,-4.343 ; 2.21,-2.134 67.589,-2.134 ; 2.362,-46.685 67.945,-46.685 ; 69.977,-44.653 69.977,-4.521
  lines w0.152: 0,-44.348 ccw(c2.4,-44.285) 2.464,-46.685 ; 0,-4.318 cw(c2.248,-4.407) 2.337,-2.159 ; 67.615,-2.134 cw(c67.615,-4.496) 69.977,-4.496 ; 67.945,-46.685 ccw(c67.742,-44.45) 69.977,-44.247

## Other copper
Top Layer:
  rectangle net 3.3V: 0.178,-38.837 7.036,-31.064
  text "STM32F103RBT6" at 53.772,-31.521 h1.8 r90
Bottom Layer:
  rectangle: 0.279,-38.837 7.696,-31.039
  text "2013-12-23" at 22.657,-40.64 h1.5

## Silkscreen, mask and mechanical layers (free items; w line width, h text height)
Top Overlay:
  lines w0.203: 11.938,-10.033 11.963,-10.058 52.578,-10.058 ; 11.938,-7.62 11.938,-12.802 52.578,-12.802 52.578,-7.62 ; 12.065,-38.379 52.629,-38.379 ; 14.3,-40.919 14.376,-40.843 14.376,-35.916 ; 14.402,-12.725 14.402,-7.62 ; 16.713,-40.945 16.713,-35.865 ; 16.967,-12.776 16.967,-7.62 ; 19.406,-12.776 19.406,-7.772 ; 19.507,-35.89 19.507,-40.945 19.533,-40.97 ; 22.047,-40.996 22.073,-40.97 22.073,-35.916 ; 22.2,-12.802 22.2,-7.696 ; 24.562,-40.97 24.562,-35.865 ; 24.714,-12.624 24.714,-7.772 ; 27.178,-7.62 27.178,-12.681 27.356,-12.859 ; 27.229,-40.97 27.229,-35.89 ; 29.743,-40.919 29.743,-35.941 ; 29.794,-12.802 29.794,-7.62 ; 32.182,-40.945 32.182,-35.865 ; 32.207,-12.776 32.207,-7.671 ; 34.468,-40.894 34.468,-35.916 ; 34.747,-12.751 34.747,-7.696 ; 36.957,-40.894 36.957,-35.865 ; 37.236,-12.751 37.236,-7.62 ; 39.675,-40.97 39.675,-35.89 ; 39.726,-12.802 39.726,-7.62 ; 42.342,-40.996 42.342,-35.941 ; 42.52,-12.719 42.52,-7.747 ; 44.933,-12.7 44.933,-7.696 ; 45.009,-40.919 45.009,-35.941 ; 47.422,-12.751 47.422,-7.645 ; 47.447,-40.945 47.447,-35.941 ; 50.038,-12.7 50.038,-7.671 ; 50.216,-40.996 50.216,-35.916
  lines w0.254: 12.014,-40.97 12.014,-35.865 23.444,-35.865 52.654,-35.865 52.654,-40.97
  lines w0.3: 59.614,-37.973 59.69,-38.049 ; 61.112,-41.656 61.112,-36.779 ; 61.189,-41.732 69.748,-41.732 69.748,-36.957 ; 63.424,-37.211 63.398,-37.186 61.189,-37.186 61.163,-37.16 61.163,-11.811 ; 63.424,-11.811 61.163,-11.811 ; 68.021,-11.811 69.698,-11.811 ; 68.25,-37.211 69.621,-37.211 69.698,-37.135 69.698,-11.811 ; 61.163,-11.811 61.163,-7.341 69.621,-7.341 69.698,-7.417 69.698,-11.811
  text "复位" at 62.027,-6.934 h2.5
  text "3.3V" at 18.567,-9.55 h1 r90
  text "3.3V" at 13.513,-9.576 h1 r90
  text "3.3V" at 16.053,-9.576 h1 r90
  text "GND" at 21.006,-9.652 h1 r90
  text "PA06" at 26.06,-9.81 h1 r90
  text "PA02" at 31.293,-9.798 h1 r90
  text "PA00" at 33.757,-9.799 h1 r90
  text "PC02" at 36.322,-9.798 h1 r90
  text "PC00" at 38.735,-9.799 h1 r90
  text "PB07" at 46.457,-9.802 h1 r90
  text "PB05" at 49.047,-9.815 h1 r90
  text "PB03" at 51.613,-9.804 h1 r90
  text "PA04" at 28.829,-9.822 h1 r90
  text "PC14" at 41.808,-9.822 h1 r90
  text "PB09" at 44.069,-9.83 h1 r90
  text "PC04" at 23.647,-9.855 h1 r90
  text "+5V" at 13.411,-11.945 h1 r90
  text "+5V" at 16.154,-11.938 h1 r90
  text "+5V" at 18.644,-11.963 h1 r90
  text "GND" at 20.98,-12.264 h1 r90
  text "PA01" at 33.706,-12.395 h1 r90
  text "PC01" at 38.633,-12.392 h1 r90
  text "PC05" at 23.698,-12.509 h1 r90
  text "PA07" at 26.035,-12.497 h1 r90
  text "PA03" at 31.267,-12.497 h1 r90
  text "PC03" at 36.271,-12.499 h1 r90
  text "PC15" at 41.681,-12.509 h1 r90
  text "PC13" at 44.018,-12.499 h1 r90
  text "PB06" at 48.997,-12.505 h1 r90
  text "PA05" at 28.804,-12.522 h1 r90
  text "PB08" at 46.406,-12.522 h1 r90
  text "PB04" at 51.638,-12.522 h1 r90
  text "GND" at 20.625,-14.3 h1
  text "BOOT1" at 16.967,-14.376 h1
  text "3.3V" at 14.453,-14.427 h1
  text "3.3V" at 14.834,-20.777 h1
  text "BOOT0" at 17.12,-20.777 h1
  text "GND" at 20.904,-20.904 h1
  text "电源" at 9.423,-29.515 h2.5 r90
  text "+5V" at 13.538,-37.821 h1 r90
  text "+5V" at 15.85,-37.821 h1 r90
  text "GND" at 18.415,-38.024 h1 r90
  text "PC11" at 49.073,-38.1 h1 r90
  text "PB00" at 21.057,-38.125 h1 r90
  text "PB02" at 23.698,-38.124 h1 r90
  text "PB13" at 28.778,-38.131 h1 r90
  text "PC07" at 33.731,-38.129 h1 r90
  text "PA09" at 38.583,-38.127 h1 r90
  text "PA11" at 41.326,-38.125 h1 r90
  text "PA13" at 44.272,-38.131 h1 r90
  text "PD02" at 51.689,-38.124 h1 r90
  text "PB11" at 26.162,-38.151 h1 r90
  text "PB15" at 31.293,-38.151 h1 r90
  text "PC09" at 35.992,-38.151 h1 r90
  text "PA15" at 46.457,-38.151 h1 r90
  text "3.3V" at 13.538,-40.472 h1 r90
  text "3.3V" at 16.002,-40.472 h1 r90
  text "3.3V" at 51.664,-40.538 h1 r90
  text "GND" at 18.415,-40.564 h1 r90
  text "PB01" at 21.107,-40.665 h1 r90
  text "PB10" at 23.673,-40.742 h1 r90
  text "PB12" at 26.137,-40.792 h1 r90
  text "PC06" at 31.369,-40.804 h1 r90
  text "PC08" at 33.655,-40.796 h1 r90
  text "PA08" at 35.992,-40.796 h1 r90
  text "PA10" at 38.608,-40.792 h1 r90
  text "PA12" at 41.3,-40.791 h1 r90
  text "PC10" at 46.533,-40.792 h1 r90
  text "PC12" at 49.124,-40.791 h1 r90
  text "PB14" at 28.88,-40.816 h1 r90
  text "PA14" at 44.145,-40.816 h1 r90
  text "TXD" at 53.975,-43.18 h1
  text "RXD" at 56.49,-43.205 h1
  text "GND" at 59.055,-43.231 h1
Top Solder:
  text "STM32F103RBT6" at 53.772,-31.521 h1.8 r90
Bottom Solder:
  text "2013-12-23" at 22.657,-40.64 h1.5

## Text inside footprints (layer, text, board x,y; h text height)
C20: Top Overlay "+" at 9.195,-10.185 h0.76
C21: Top Overlay "+" at 7.29,-44.171 h0.8 r180
Designator61: Bottom Overlay "Studio" at 2545.714,2494.306 h3.81; Bottom Overlay "蓝电工作室" at 2545.817,2492.401 h2.54
Designator62: Bottom Overlay "Studio" at 2547.772,2494.306 h3.81; Bottom Overlay "蓝电工作室" at 2547.874,2492.401 h2.54
Designator63: Bottom Overlay "Studio" at 2553.893,2492.655 h3.81; Bottom Overlay "蓝电工作室" at 2553.995,2490.75 h2.54
Designator64: Bottom Overlay "Studio" at 2551.836,2494.306 h3.81; Bottom Overlay "蓝电工作室" at 2551.938,2492.401 h2.54
Designator65: Bottom Overlay "Studio" at 2564.891,2500.758 h3.81; Bottom Overlay "蓝电工作室" at 2564.994,2498.853 h2.54
Designator66: Bottom Overlay "Studio" at 2564.764,2485.493 h3.81; Bottom Overlay "蓝电工作室" at 2564.867,2483.588 h2.54
Designator67: Bottom Overlay "Studio" at 2556.331,2479.981 h3.81; Bottom Overlay "蓝电工作室" at 2556.434,2478.076 h2.54
JTG: Top Overlay "20" at 64.694,-11.557 h0.8 r90; Top Overlay "19" at 67.234,-11.557 h0.8 r90; Top Overlay "1" at 67.234,-38.481 h0.8 r90; Top Overlay "2" at 64.694,-38.481 h0.8 r90